# EAGLE board SmartThermo1.8 (EAGLE 8.4.0)
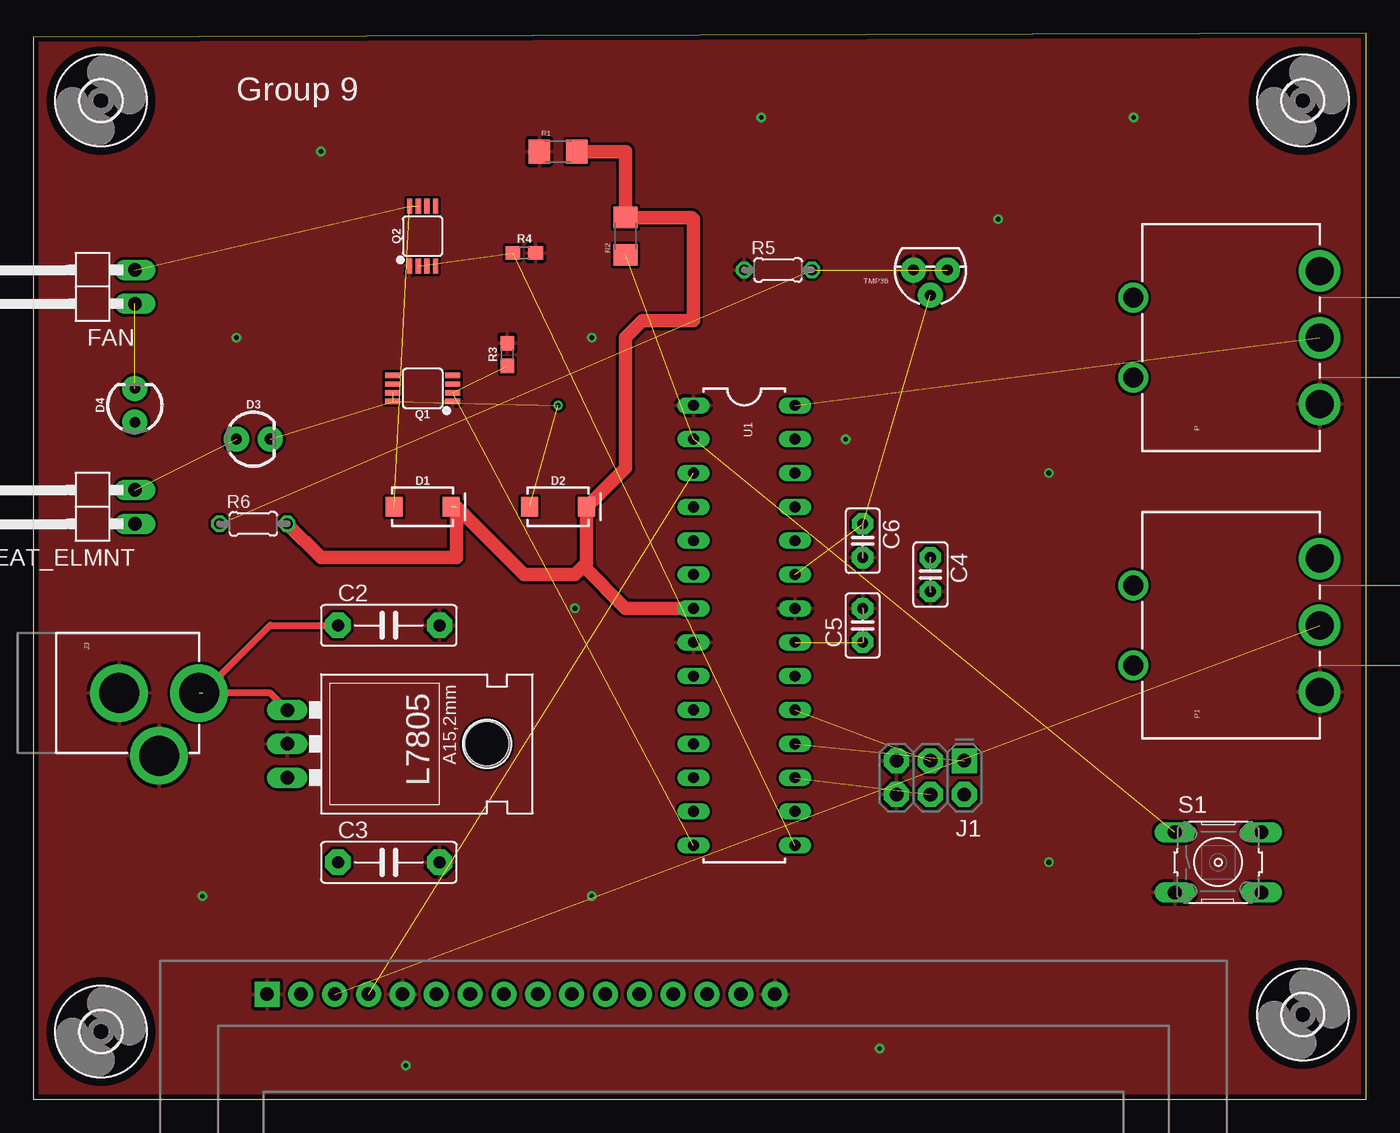
[diagram p0: board, top side]
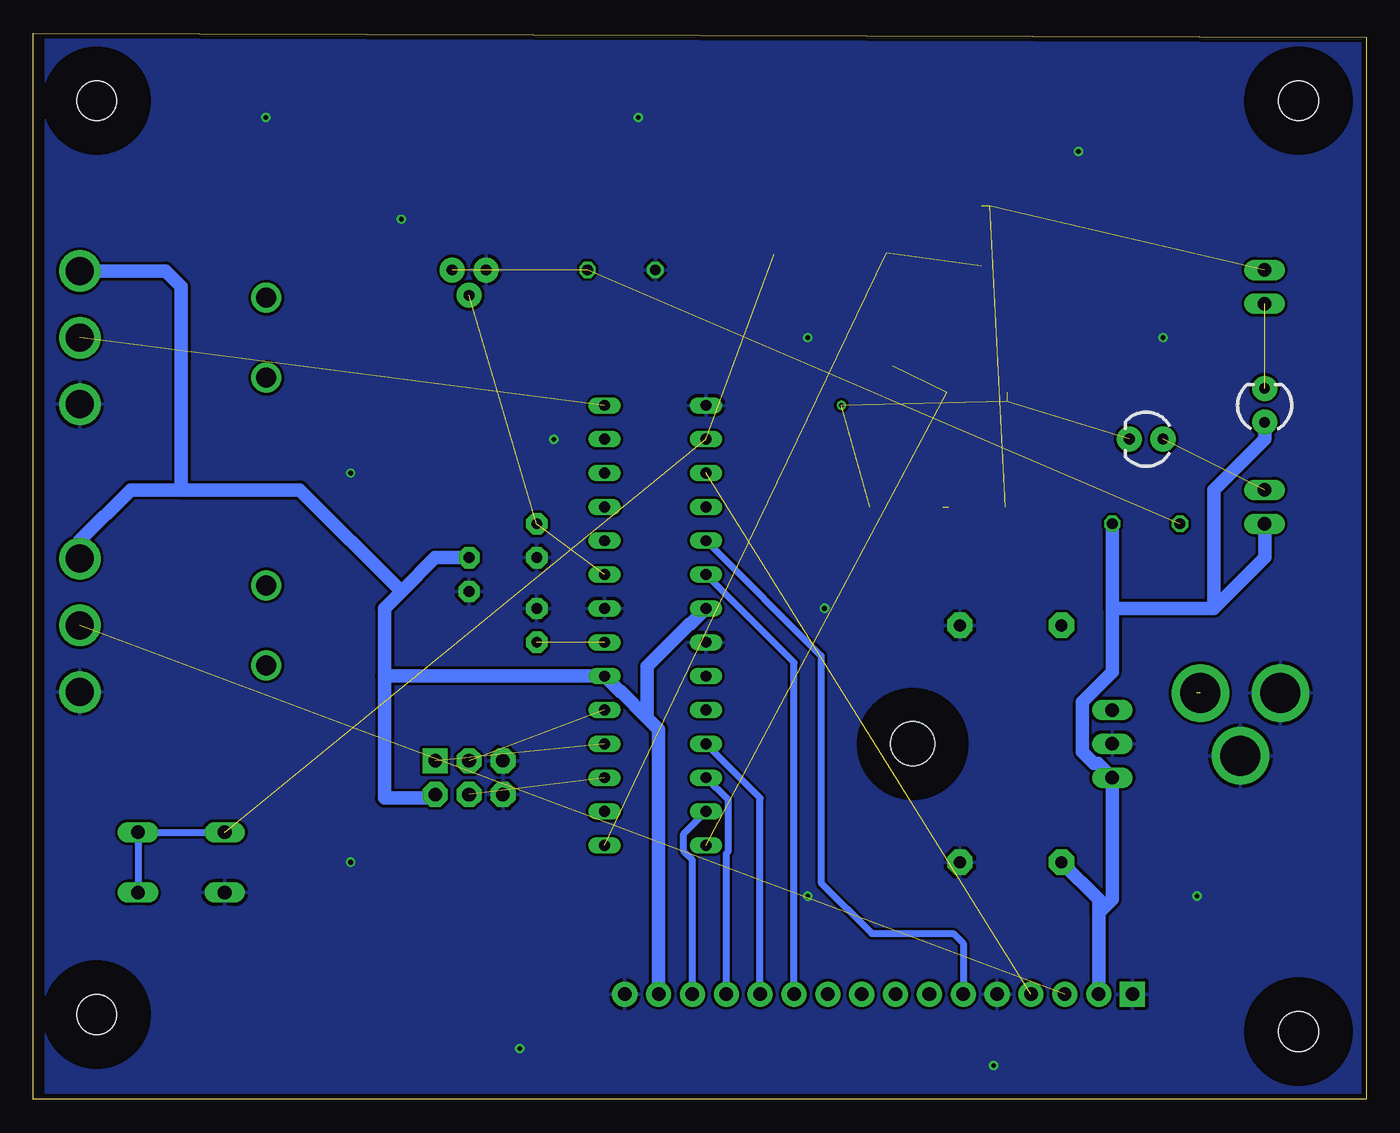
[diagram p1: board, bottom side, seen from below]

Size 100.01 x 79.98 mm. Coordinates in mm from the lower left corner, seen from the top.
Outline: 0,0 100,0 100,79.98 0,79.68 0,0
Copper layers (1*16): Top 0.0356mm / dielectric 1.5011mm / Bottom 0.0356mm
Design rules "oshpark-2layer": minimum track width 6mil, minimum drill 13mil, track to track 6mil, track to pad 6mil, pad to pad 6mil, via to via 6mil, smd to smd 6mil, copper to edge 15mil, drill to drill 6mil, minimum pad ring 7mil, minimum via ring 7mil, stop-mask expansion 2.5mil, vias tented up to drill 0mil, thermal gap 10mil
Net classes: 0 default: clearance 0.205 mm

## Footprints (pad centres in the part's own frame; a part is rotated, then mirrored left to right if it is on the bottom)
C7.5B3 = drill 0.914 pad 1.905 octagon: 1 -3.81,0; 2 3.81,0
C2.5-2 = drill 0.813 pad 1.6 octagon: 1 -1.27,0; 2 1.27,0
SMA-DIODE = smd 1.27 x 1.47: A -2.15,0; C 2.15,0
LED_3MM = drill 0.813 pad 1.88: A -1.27,0; K 1.27,0
1X02/90 = drill 1.016 long: 1 -1.27,-3.81; 2 1.27,-3.81
3,0 = hole 3: 0,0
2X3-NS = drill 1.016 pad 1.88 square: 1 -2.54,-1.27 | drill 1.016 pad 1.88 octagon: 2 -2.54,1.27; 3 0,-1.27; 4 0,1.27; 5 2.54,-1.27; 6 2.54,1.27
POWER_JACK_PTH = drill 2.997 pad 4.318: GND 0,7.7; GNDBREAK 4.7,10.7; PWR 0,13.7
78XXL = drill 1.016 long: GND 0,-3.81; IN -2.54,-3.81; OUT 2.54,-3.81 | hole 3.302: 0,11.176
POT_PTH = drill 2.1: E@1 -5,0; E@2 5,0; WAND 0,0 | drill 1.5: S1 -3,14; S2 3,14
MSOP8 = smd 0.4 x 1.1: 1 -0.975,-2.25; 2 -0.325,-2.25; 3 0.325,-2.25; 4 0.975,-2.25; 5 0.975,2.25; 6 0.325,2.25; 7 -0.325,2.25; 8 -0.975,2.25
1206 = smd 1.6 x 1.8: 1 -1.4,0; 2 1.4,0
0603 = smd 1.1 x 1: 1 -0.85,0; 2 0.85,0
0204/5 = drill 0.813 octagon: 1 -2.54,0; 2 2.54,0
B3F-10XX = drill 1.016 long: 1 -3.251,2.261; 2 3.251,2.261; 3 -3.251,-2.261; 4 3.251,-2.261
TO-92 = drill 0.813 pad 1.88: 1 -1.27,0; 2 0,1.905; 3 1.27,0
DIL28-3 = drill 0.813 long: 1 -16.51,-3.81; 2 -13.97,-3.81; 3 -11.43,-3.81; 4 -8.89,-3.81; 5 -6.35,-3.81; 6 -3.81,-3.81; 7 -1.27,-3.81; 8 1.27,-3.81; 9 3.81,-3.81; 10 6.35,-3.81; 11 8.89,-3.81; 12 11.43,-3.81; 13 13.97,-3.81; 14 16.51,-3.81; 15 16.51,3.81; 16 13.97,3.81; 17 11.43,3.81; 18 8.89,3.81; 19 6.35,3.81; 20 3.81,3.81; 21 1.27,3.81; 22 -1.27,3.81; 23 -3.81,3.81; 24 -6.35,3.81; 25 -8.89,3.81; 26 -11.43,3.81; 27 -13.97,3.81; 28 -16.51,3.81
LCD-16X2_NOHOLES = drill 1.016 pad 1.88 square: 1 -32,15.5 | drill 1.016 pad 1.88: 2 -29.46,15.5; 3 -26.92,15.5; 4 -24.38,15.5; 5 -21.84,15.5; 6 -19.3,15.5; 7 -16.76,15.5; 8 -14.22,15.5; 9 -11.68,15.5; 10 -9.14,15.5; 11 -6.6,15.5; 12 -4.06,15.5; 13 -1.52,15.5; 14 1.02,15.5; 15 3.56,15.5; 16 6.1,15.5

## Placement (x,y rotation side)
C2  10uF  [C7.5B3]  26.67,35.56 0 top
C3  10uF  [C7.5B3]  26.67,17.78 0 top
C4  100nF  [C2.5-2]  67.31,39.37 270 top
C5  100nF  [C2.5-2]  62.23,35.56 90 top
C6  100nF  [C2.5-2]  62.23,41.91 270 top
D1  3A/40V/500mV  [SMA-DIODE]  29.21,44.45 0 top
D2  3A/40V/500mV  [SMA-DIODE]  39.37,44.45 0 top
D3  [LED_3MM]  16.51,49.53 0 top
D4  [LED_3MM]  7.62,52.07 90 top
FAN  [1X02/90]  3.81,60.96 90 top
H1  MOUNT-HOLE3.0  [3,0]  95.25,6.35 0 top
H2  MOUNT-HOLE3.0  [3,0]  5.08,5.08 0 top
H3  MOUNT-HOLE3.0  [3,0]  5.08,74.93 0 top
H4  MOUNT-HOLE3.0  [3,0]  95.25,74.93 0 top
HEAT_ELMNT  [1X02/90]  3.81,44.45 90 top
J1  AVR_SPI_PRG_6NS  [2X3-NS]  67.31,24.13 180 top
J3  POWER_JACKPTH  [POWER_JACK_PTH]  -1.27,30.48 270 top
L7805  [78XXL]  22.86,26.67 270 top
P  10K  [POT_PTH]  96.52,57.15 90 top
P1  10K  [POT_PTH]  96.52,35.56 90 top
Q1  IRF7509  [MSOP8]  29.21,53.34 90 top
Q2  IRF7509  [MSOP8]  29.21,64.77 0 top
R1  10K  [1206]  39.37,71.12 0 top
R2  10K  [1206]  44.45,64.77 90 top
R3  47k  [0603]  35.56,55.88 90 top
R4  47k  [0603]  36.83,63.5 0 top
R5  12k  [0204/5]  55.88,62.23 0 top
R6  10k  [0204/5]  16.51,43.18 0 top
S1  [B3F-10XX]  88.9,17.78 0 top
TMP36  [TO-92]  67.31,62.23 180 top
U1  ATMEGA328P_PDIP  [DIL28-3]  53.34,35.56 270 top
U2  LCD-16X2NOHOLES  [LCD-16X2_NOHOLES]  49.53,-7.62 0 top

## Library data of the parts
C2-C6 = capacitor-wima
D1 D2 = SparkFun-DiscreteSemi; PROD_ID: DIO-09886
D3 D4 = SparkFun-LED; PROD_ID: DIO-08794
FAN HEAT_ELMNT = pinhead
H1-H4 = holes
J1 = SparkFun-Connectors
J3 = SparkFun-Connectors; PROD_ID: CONN-08197
L7805 = v-reg
P P1 = button_TestFootprint
Q1 Q2 = SparkFun-DiscreteSemi; PROD_ID: TRANS-07913
R1 R2 = SparkFun-Passives
R3 R4 = SparkFun-Resistors; PROD_ID: RES-07871
R5 R6 = resistor
S1 = switch-omron; MPN: B3F-1000; OC_FARNELL: 176432; OC_NEWARK: 36M3542
TMP36 = SparkFun-Sensors
U1 = SparkFun-DigitalIC
U2 = SparkFun-Displays

## Nets
+5V: C3.1 C4.1 D1.C D2.C D4.A HEAT_ELMNT.1 J1.2 L7805.OUT P1.E@2 P.E@2 R1.2 R2.2 R6.2 U1.7 U1.20 U2.2 U2.15
GND: C2.2 C3.2 C4.2 C5.2 C6.2 J1.5 J1.6 J3.GND J3.GNDBREAK L7805.GND P1.E@1 P.E@1 Q1.1 Q2.1 R1.1 R3.2 R4.2 R5.1 S1.3 TMP36.3 U1.1 U1.8 U1.22 U2.1 U2.5 U2.16
N$2: C6.1 TMP36.2 U1.23
N$3: P.WAND U1.28
N$4: Q2.2 R4.1 U1.15
N$5: U1.3 U2.4
N$6: P1.WAND U2.3
N$7: U1.5 U2.6
N$8: U1.6 U2.11
N$9: U1.11 U2.12
N$10: U1.12 U2.13
N$11: U1.13 U2.14
N$12: C2.1 J3.PWR L7805.IN
N$13: D1.A FAN.2 Q2.7 Q2.8
N$14: R5.2 R6.1 TMP36.1
N$15: R2.1 S1.1 S1.2 S1.4 U1.2
N$16: J1.1 U1.18
N$17: D3.A HEAT_ELMNT.2
N$18: J1.4 U1.17
N$19: Q1.2 R3.1 U1.14
N$20: J1.3 U1.19
N$21: D2.A D3.K Q1.7 Q1.8
N$22: D4.K FAN.1
N$26: C5.1 U1.21

## Tracks (layer width: path | path; a pad name or v marks a point on that pad's centre or on a via)
+5V  (1 unrouted)
  Top 1.016: R1.2 44.45,71.12 R2.2 49.4,66.17 49.53,66.04 49.53,58.42 45.72,58.42 44.45,57.15 44.45,47.38 D2.C 41.52,40.25 41.27,40.01 | R6.2 21.59,40.64 31.75,40.64 31.75,44.45 36.83,39.37 40.64,39.37 41.27,40.01 | U1.7 44.45,36.83 41.27,40.01
  Bottom 1.016: 20.07,13.97 U2.2 | 20.07,13.97 20.07,14.99 C3.1 | 20.07,13.97 19.05,14.99 L7805.OUT 20.11,25.2 20.42,25.2 21.29,26.06 21.29,29.82 19.05,32.06 19.05,36.83 | 19.05,36.83 R6.2 | HEAT_ELMNT.1 7.62,40.64 11.43,36.83 | 11.43,36.83 19.05,36.83 | D4.A 7.62,49.53 11.43,45.72 11.43,36.83 | U2.15 53.09,27.75 53.94,28.61 | 53.94,28.61 55.92,30.58 55.98,30.58 U1.20 73.66,31.75 | 73.66,31.75 73.66,36.83 72.39,38.1 | 72.39,38.1 69.85,40.64 C4.1 | P1.E@2 96.52,41.91 92.71,45.72 88.9,45.72 | 88.9,45.72 80.01,45.72 72.39,38.1 | P.E@2 90.09,62.15 88.9,60.96 88.9,45.72 | U1.7 50.7,35.66 50.76,35.66 53.94,32.48 53.94,28.61 | 73.66,31.75 73.66,22.61 70.1,22.61 J1.2
GND  (via drill 0.35)
  other vias: 72.39,66.04 76.2,46.99 76.2,17.78 40.64,36.83 41.91,15.24 12.7,15.24 15.24,57.15 21.59,71.12 54.61,73.66 41.91,57.15 82.55,73.66 63.5,3.81 27.94,2.54 60.96,49.53
  pour Top: 0,0 0,80.01 100.33,80.01 100.33,0
  pour Bottom: 0,0 99.06,0 99.06,80.01 0,80.01
N$2  (2 unrouted)
N$3  (1 unrouted)
N$4  (2 unrouted)
N$5  (1 unrouted)
N$6  (1 unrouted)
N$7
  Bottom 0.508: U1.5 40.89,33.27 40.89,16.26 37.08,12.45 30.99,12.45 30.23,11.69 U2.6
N$8
  Bottom 0.508: U2.11 42.93,32.77 U1.6
N$9
  Bottom 0.508: U2.12 45.47,22.61 U1.11
N$10
  Bottom 0.508: U2.13 48.01,18.45 47.85,18.61 47.85,22.45 U1.12
N$11
  Bottom 0.508: U2.14 50.55,17.95 51.21,18.61 51.21,19.91 U1.13
N$12  (1 unrouted)
  Top 0.508: L7805.IN 17.78,30.48 12.7,30.48 17.78,35.56 C2.1
N$13  (3 unrouted)
N$14  (2 unrouted)
N$15  (2 unrouted)
  Top 0.508: 44.45,63.82 R2.1
  Bottom 0.508: S1.4 S1.2 S1.1
N$16  (1 unrouted)
N$17  (1 unrouted)
N$18  (1 unrouted)
N$19  (2 unrouted)
N$20  (1 unrouted)
N$21  (via drill 0.35)  (4 unrouted)
  other vias: 39.37,52.07
N$22  (1 unrouted)
N$26  (1 unrouted)

## Text on the board
tPlace: Group 9